# Altium PCB MasterBoard.PcbDoc (part 3 of 4)
Units mil, origin at the board's own origin, x right, y up, seen from the top; angles counter-clockwise.
Board outline 11195 x 7075 mil, 2 copper layers (Top Layer, Bottom Layer); 563 components, 331 nets, 1395 pads, 369 vias.
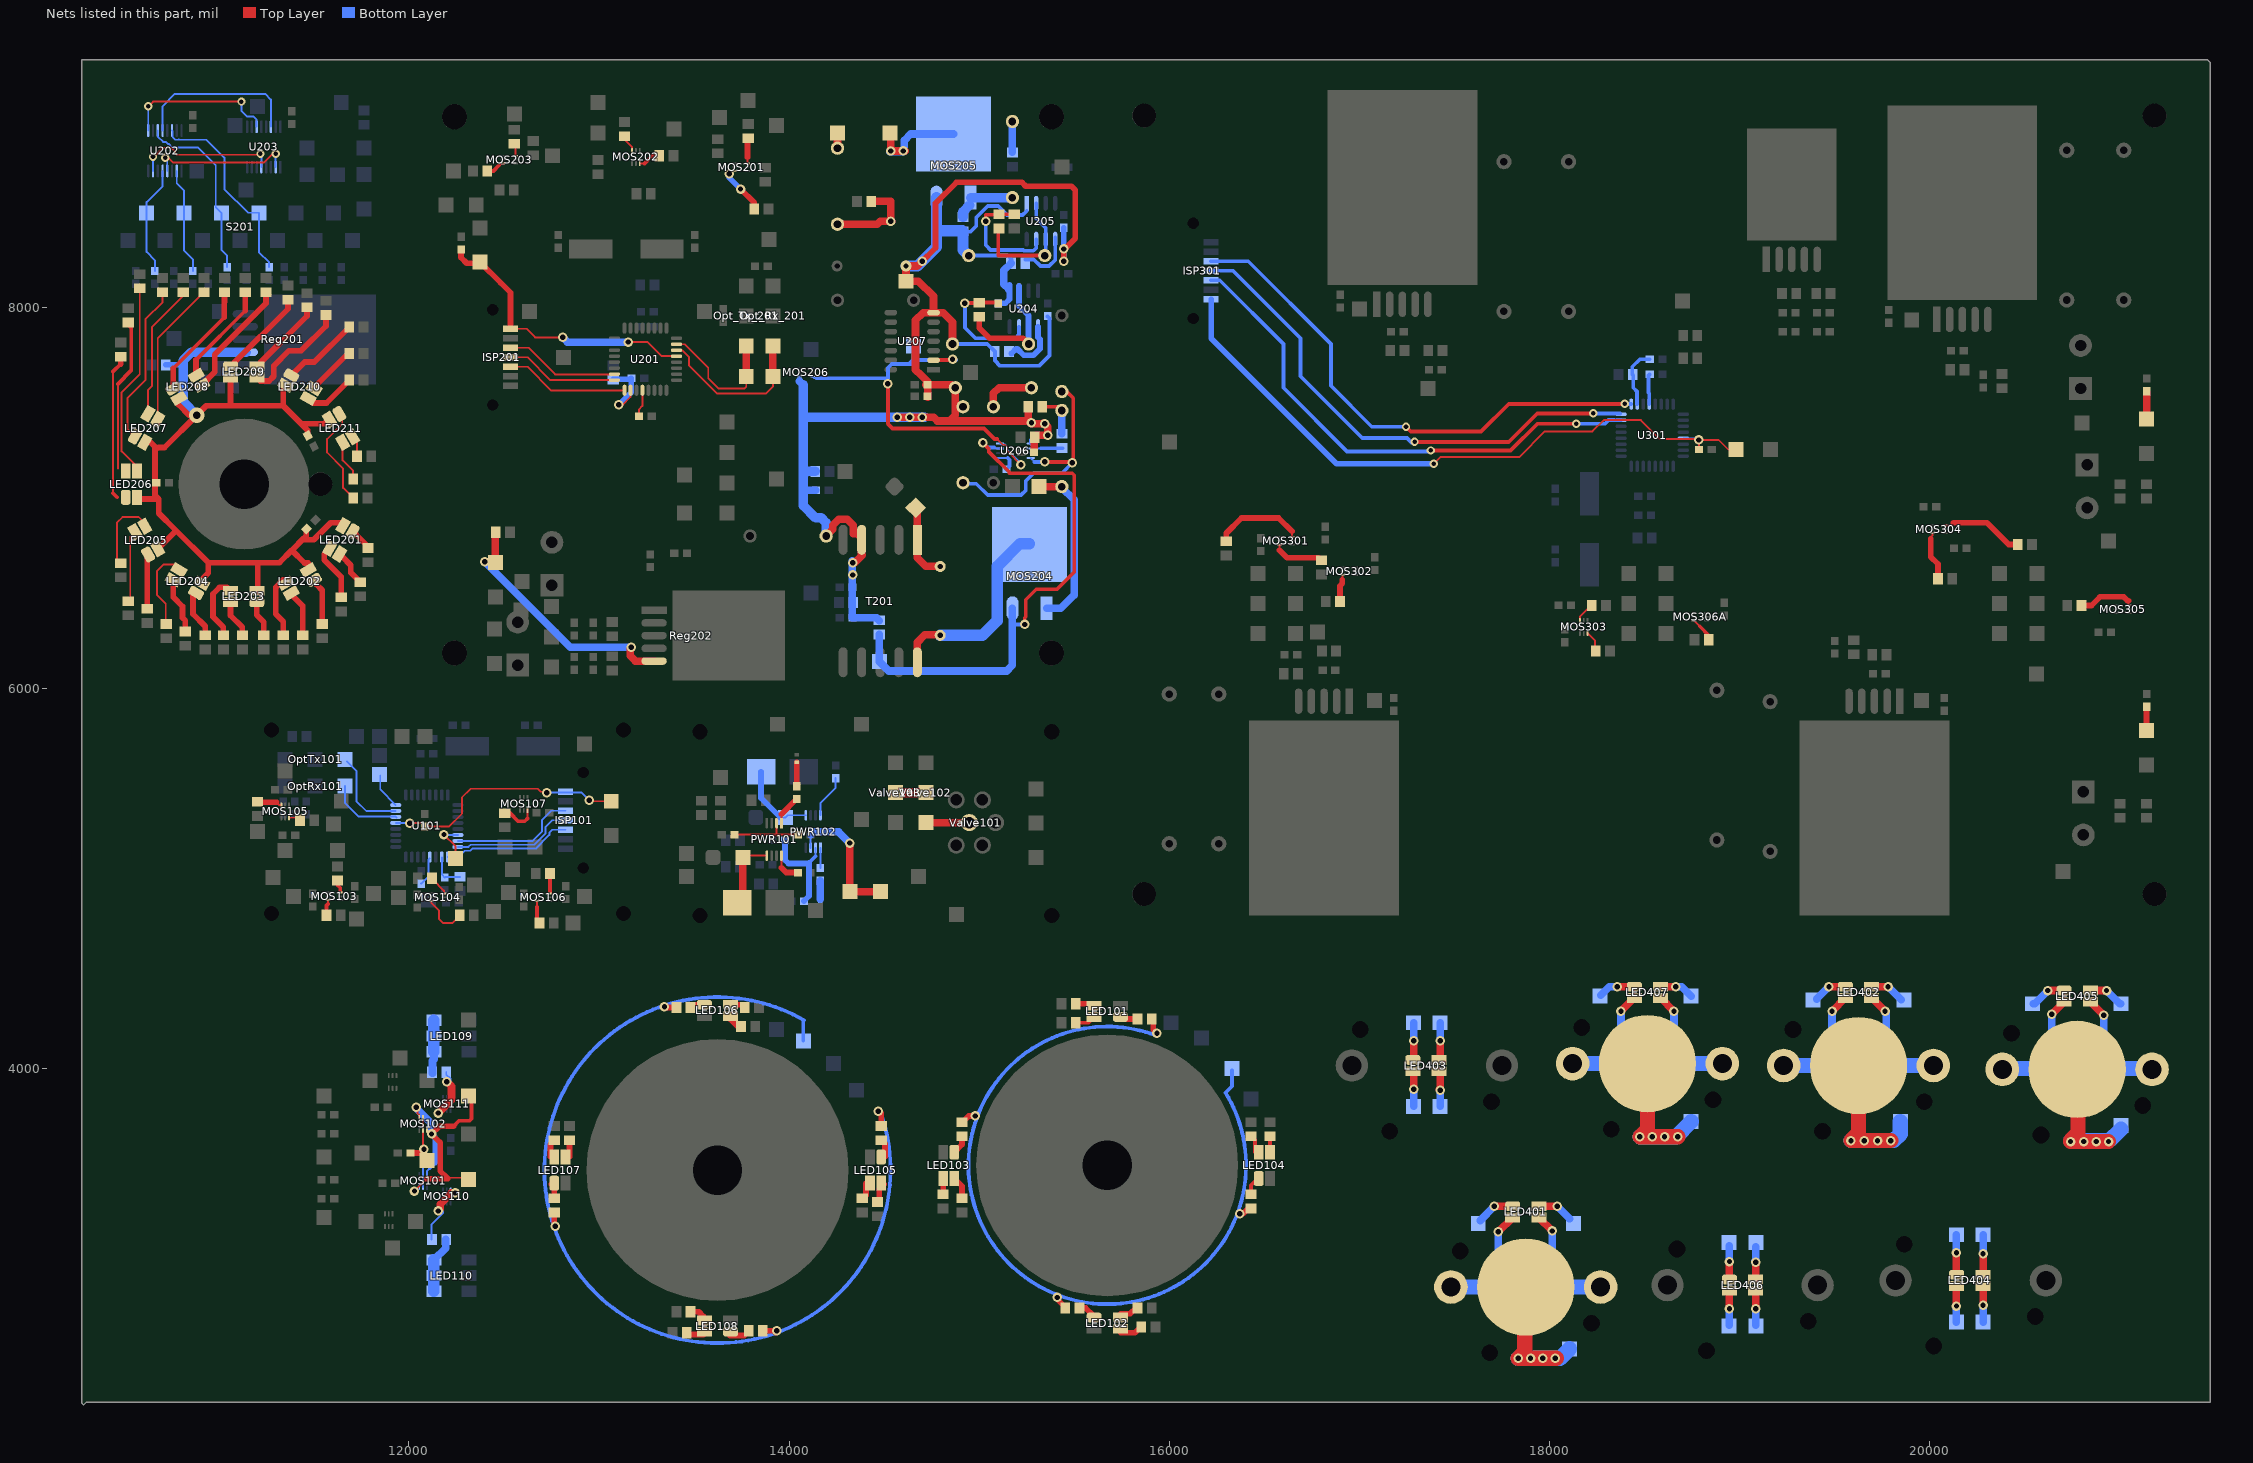
[diagram p3: the nets of this part, all layers, seen from the top]

## Via types
v1: diameter 50, hole 28, Top Layer to Bottom Layer, 263 vias
v2: diameter 80, hole 60, Top Layer to Bottom Layer, 55 vias
v3: diameter 44, hole 24, Top Layer to Bottom Layer, 25 vias
v4: diameter 72, hole 52, Top Layer to Bottom Layer, 11 vias
v5: diameter 145, hole 125, Top Layer to Bottom Layer, 8 vias
v6: diameter 60, hole 40, Top Layer to Bottom Layer, 2 vias
v7: diameter 80, hole 40, Top Layer to Bottom Layer, 2 vias
v8: diameter 100, hole 60, Top Layer to Bottom Layer, 1 vias
v9: diameter 100, hole 80, Top Layer to Bottom Layer, 1 vias
v10: diameter 50, hole 28, Top Layer to Bottom Layer, tented top, 1 vias

## Nets (pads, with @x,y where several pads share a name; then routed paths per layer and width w, separated by ;. In a path a pad name is that pad's centre, name@x,y a point inside that pad or via, vN(x,y) a via of type N, cw(c..) or ccw(c..) an arc to the next point about the centre after c; other vN are vias at no path point) (continued)
HVGND201: C213.1 C218.2 C219.2 C220.2 C221.2 C222.2 C230.1 C231.1 C232.1 C233.1 C234.2 C235.2 C236.2 C237.2 C238.2 C242.2 C243.2 C299.2 L205.1 MOS205.3 MOS206.1 R261.2 R263a.2 R265.2 R275.2 R276.1 T201.4 TP226.1 U204.1 U205.1 U206.5 U207.7 | length 9933.3
  Top Layer w20: TP226.1@14615,8140 C213.1@14615,8220
  Top Layer w30: v1@14695,8240 14770,8315 14770,8550 14880,8660 15225,8660 15245,8640 15485,8640 15505,8620 15505,8365 15445,8305 v1(15445,8245)
  Top Layer w40: L205.1@14195,6800 14230.83,6835.83 14230.83,6857.33 14262.24,6888.74 14306.66,6888.74 14338.07,6857.33 14338.07,6811.93 14358.07,6811.93 14380,6790 14380,6700 ; v1(14335,6660) 14345,6660 14385,6700 ; v1@14575,7425 14760,7425 14780,7405 15260,7405 15275,7390 v1(15345,7390) ; C213.1@14615,8220 14675,8220 v1(14700,8245) ; C213.1@14615,8230 TP226.1@14615,8140 14680,8140 14760,8060 U207.7@14760,7975 14810,7975 14860,7925 C232.1@14860,7810 ; C242.2@14728.46,7595 14728.46,7611.84 14695.62,7644.69 14695.31,7644.69 14665,7675 14665,7935 14705,7975 U207.7@14780,7975 ; C243.2@14730,7530 14730,7585 14720,7595 14773.46,7595 14855,7595 R263a.2@14875,7575 ; 14845,7405 14875,7435 14875,7485 ; R263a.2@14875,7580 14875,7485 ; R265.2@14920,7485 14875,7485 ; R275.2@15257.6,7480 15257.6,7412.4 v1@15280,7390 ; C237.2@15290,7240 15290,7317.6 C234.2@15292.4,7320 ; C234.2@15300,7330 v1(15360,7330) 15360,7375 v1@15340,7395
  Bottom Layer w10: 14055,7615 MOS206.1@14055,7640
  Bottom Layer w20: C232.1@14860,7810 15042.6,7810 C230.1@15082.6,7770 15082.6,7722.4 15110,7695 15315,7695 15370,7750 15370,7945 C220.2@15360,7955 ; R276.1@14920,8400 14955,8400 14985,8430 14985,8475 15045,8535 15100,8535 15146.54,8488.46 C238.2@15185,8488.46 15228.46,8488.46 15250,8510 ; C233.1@14945,8275 15150,8275 C231.1@15170,8255 ; v1@15260,7395 15340,7395 15360,7375 v1(15360,7330) ; U206.5@15271.42,7286.77 15271.42,7306.42 15295,7330 v1@15370,7330
  Bottom Layer w30: C235.2@15100,8023.46 15138.46,8023.46 15160,8045 U204.1@15160,8120 ; 15445,8270 C299.2@15445,8421.54
  Bottom Layer w40: 14055,7615 14075,7595 ; 14085,7040 C236.2@14141.54,7040 ; v1@14333.46,6668.46 C222.2@14333.46,6530 C221.2@14333.46,6370 14460,6370 R261.2@14475,6355 ; U204.1@15155,8095 15155,8100 15130,8125 15130,8197.4 C231.1@15167.6,8235
  Bottom Layer w50: 14075,7595 14075,7425 ; 14080,7140 C218.2@14137.6,7140 ; 14090,7135 14075,7150 ; L205.1@14195,6800 14195,6870 14170,6895 14140,6895 14075,6960 14075,7150 ; v1@14715,7425 14580,7425 14550,7425 14075,7425 ; 14075,7150 14075,7390 14075,7425
  Bottom Layer w60: C213.1@14615,8220 14675,8220 14775.47,8320.47 14775.47,8404.53 R276.1@14910.47,8404.53 ; 14775.47,8400.47 MOS205.3@14775.47,8580 ; R276.1@14915,8402.6 14915,8305 C233.1@14945,8275
  other v1: 14335,6595 15275,7395 14570,7425 14635,7425 14700,7425 15445,8310
ISENSE_201: MOS204.3 R261.1 TP220.1 U206.3 | length 2874.5
  Top Layer w20: v1@15015,7295 15050,7260 15050,7245 15160,7135 ; 15160,7130 15490,7130 15500,7120 15500,6610 15410,6520 15300,6520 15245,6465 15245,6375 15240,6370 v1@15240,6330
  Bottom Layer w10: 15079.55,7265 15084.55,7260 U206.3@15125,7260
  Bottom Layer w20: v1(15020,7290) 15045,7265 15079.55,7265 ; 15185,6335 v1(15240,6335)
  Bottom Layer w40: R261.1@14475,6282.6 TP220.1@14475,6140 14525,6090 15145,6090 15175,6120 MOS204.3@15175,6420
MISO101: ISP101.4 U101.16 | length 624.2
  Bottom Layer w10: U101.16@12258.39,5164.76 12313.5,5164.76 12325,5176.26 12659.54,5176.26 12720,5236.72 12720,5270 12755,5305 ISP101.4@12805,5305
MISO201: ISP201.4 U201.16 | length 594.7
  Top Layer w10: ISP201.4@12535,7740 12625,7740 12745,7620 U201.16@13080,7620
MISO301: ISP301.4 U301.16 | length 2705
  Top Layer w20: v3(17290,7295) 17785,7295 17935,7445 v3(18230,7445)
  Bottom Layer w20: ISP301.4@16220,8195 16335,8195 16690,7840 16690,7640 17015,7315 17250,7315 17275,7290 v3(17290,7295) ; v3(18230,7445) U301.16@18370,7445
MOSI101: ISP101.3 U101.15 | length 667.5
  Bottom Layer w10: U101.15@12258.39,5196.26 12651.26,5196.26 12700,5245 12700,5305 12750,5355 ISP101.3@12825,5355
MOSI201: ISP201.3 U201.15 | length 603
  Top Layer w10: ISP201.3@12535,7790 12630,7790 12770,7650 U201.15@13080,7650
MOSI301: ISP301.3 U301.15 | length 2730.9
  Top Layer w20: v3(17375,7250) 17795,7250 17935,7390 v3(18140,7390)
  Bottom Layer w20: ISP301.3@16220,8145 16265,8145 16600,7810 16600,7580 16935,7245 v3@17375,7245 ; v3(18140,7390) 18290,7390 18310,7410 18339.05,7410 18340.31,7408.74 U301.15@18376.61,7408.74
NetC107_2: C107.2 U101.20 | length 152.1
  Bottom Layer w10: C107.2@12065,4971.54 12104.09,5010.63 12104.09,5099.09 U101.20@12110,5105
NetC108_2: C108.2 L101.1 U101.18 | length 190.3
  Bottom Layer w10: U101.18@12175,5110 12175,5018.46 C108.2@12190,5003.46 ; C108.2@12192.4,5007.4 L101.1@12270,5007.4
NetC118_2: C118.2 PWR101.8 | length 160.6
  Top Layer w10: 13960,5055 PWR101.8@13960,5118.74
  Top Layer w30: 13960,5055 13985,5030 C118.2@14046.54,5030
NetC119_2: C119.2 R131.1 | length 126.5
  Top Layer w30: R131.1@14040,5483.46 C119.2@14040,5610
NetC120_2: C120.2 PWR102.8 | length 228.4
  Bottom Layer w10: PWR102.8@14165,5331.26 14165,5395 14245,5475 C120.2@14245,5526.54
NetC121_2: C121.2 R133.1 | length 96.5
  Bottom Layer w40: 14165,4890 R133.1@14165,4986.54
NetC201_2: C201.2 C202.2 C240.2 C241.2 LED201.2 LED202.2 LED203.2 LED204.2 LED205.2 LED206.2 LED207.2 LED208.2 LED209.2 LED210.2 LED211.2 Reg201.2 | length 4335
  Top Layer w30: LED206.2@10579.45,6995 10685,6995 ; 10641.56,7293.44 10675,7260 10665,7260 10665,7015 10685,6995 ; 10685,7265 10715,7265 v7(10885,7435) ; LED205.2@10691.28,6743.72 10770,6822.44 10770,6835 ; 10791.59,7488.41 10845,7435 v7(10885,7435) ; LED204.2@10910.93,6570.93 10945,6605 10945,6660 ; 11062.87,7487.87 LED209.2@11062.87,7615 ; LED203.2@11205,6535 11205,6660 ; 11340,7570 11340,7485 ; 11395,6735 11440,6780 ; C240.2@11461.34,6836.34 11461.34,6801.34 11440,6780 ; C202.2@11468.27,7328.98 11468.27,7356.73 11435,7390 ; 11471.95,6658.05 11451.95,6658.05 11385,6725 11320,6660 11205,6660 ; LED211.2@11570,7405 11555,7390 11435,7390 ; LED201.2@11638.31,6870 11590,6870 11500,6780 11440,6780 ; 10685,6995 10685,6920 10770,6835 ; 10770,6835 10945,6660 ; v7(10885,7435) 10935,7485 11340,7485 ; 10945,6660 11205,6660 ; 11340,7485 11435,7390
  Bottom Layer w30: C201.2@10722.4,7700 10790,7700
  Bottom Layer w50: v7(10885,7435) 10815,7505 10815,7725 10856.93,7766.93 Reg201.2@11145,7766.93
NetC208_2: C208.2 U201.20 | length 144.6
  Top Layer w10: C208.2@13210,7430 13210,7465 13229.25,7484.25 U201.20@13229.25,7566.61
NetC209_2: C209.2 L201.1 U201.18 | length 377.7
  Top Layer w10: v1(13105,7490) 13125,7490 13166.26,7531.26 U201.18@13166.26,7566.61
  Bottom Layer w30: L201.1@13075,7625 13165,7625 13170,7630 13170,7555 v1(13105,7490)
NetC211_1: C211.1 D201.3 T201.1 | length 403.6
  Top Layer w40: D201.3@14675,6950 T201.1@14675,6780 14675,6685 14720,6640 C211.1@14795,6640
NetC211_2: C211.2 MOS204.1 T201.10 | length 1077.3
  Top Layer w40: T201.10@14675,6135.91 14675,6240 14715,6280 C211.2@14795,6280
  Bottom Layer w60: C211.2@14795,6277.8 15017.8,6277.8 15095,6355 15095,6640 15215,6760 MOS204.1@15265,6760
NetC217_1: C217.1 EL201.2 MOS205.1 | length 566.6
  Top Layer w40: EL201.2@14535,8910 C217.1@14535,8825.04 v1@14610,8825.04
  Bottom Layer w40: C217.1@14530,8820 14600,8820 14605,8825 14605,8880 14639.65,8914.65 MOS205.1@14865.24,8914.65
  other v1: 14600,8825
NetC217_2: C217.2 L203.1 R273.2 | length 491.3
  Top Layer w40: L203.1@14255,8440 14465,8440 14480,8455 C217.2@14540,8455 ; R273.2@14440,8560 14535,8560 C217.2@14535,8454.96
NetC229_1: C229.1 U206.1 | length 121
  Bottom Layer w10: U206.1@15100,7210 15150,7210
  Bottom Layer w20: C229.1@15143.46,7150 15160,7166.54 15160,7200 15150,7210
NetC230_2: C230.2 U204.5 | length 309.6
  Bottom Layer w30: C230.2@15170,7760 15195.15,7785.15 15200,7785.15 15235.15,7750 15284.85,7750 15320,7785.15 15320,7834.85 15310,7844.85 U204.5@15310,7901.02
NetC231_2: C231.2 U205.5 | length 303.2
  Bottom Layer w20: C231.2@15242.4,8255 15287.22,8255 15322.22,8220 15367.78,8220 15400,8252.22 U205.5@15400,8370
NetC232_2: C232.2 R271.2 U204.2 U204.6 | length 685.9
  Top Layer w30: R271.2@15000,7955 15000,7895 15055,7840 15230,7840 C232.2@15260,7810
  Bottom Layer w30: U204.2@15210,8115 15210,8010 15260,7960 U204.6@15260,7901.02 C232.2@15260,7805
NetC233_2: C233.2 R272.2 U205.2 U205.6 | length 682.8
  Top Layer w20: R272.2@15100,8415 15100,8275 C233.2@15345,8275
  Bottom Layer w20: U205.2@15300,8550 15300,8470 15350,8420 U205.6@15350,8361.02 15350,8280 C233.2@15345,8275
NetC322_2: C322.2 U301.20 | length 160.4
  Bottom Layer w20: U301.20@18524.25,7493.39 18524.25,7549.32 18520,7553.57 18520,7645 C322.2@18525,7650
NetC323_2: C323.2 L301.1 U301.18 | length 313.5
  Bottom Layer w20: U301.18@18460,7495 18460,7560 18440,7580 18440,7645 18436.2,7648.8 18435,7650 18435,7690 18475,7730 C323.2@18526.54,7730
NetD101_3: D101.3 L102.2 PWR101.5 | length 369.3
  Top Layer w10: D101.3@13766.22,5118.74 PWR101.5@13883.23,5118.74
  Top Layer w30: L102.2@13727.8,4870 L102.2@13757.48,4899.69
  Top Layer w40: L102.2@13757.48,4899.69 D101.3@13757.48,5110
NetD102_3: D102.3 L103.2 PWR102.5 | length 420.2
  Bottom Layer w10: D102.3@13955,5320 D102.3@13982.48,5320 13993.74,5331.26 PWR102.5@14088.23,5331.26
  Bottom Layer w30: L103.2@13852.8,5560 13852.8,5422.2 D102.3@13955,5320
NetEL201_1: EL201.1 L203.2 | length 75
  Top Layer w40: L203.2@14255,8845 EL201.1@14255,8920
NetI401_1: I401.1 I403.1 | length 810
  Bottom Layer w80: I401.1@20370,4000 I403.1@20785,4000 I401.1@21180,4000
NetI402_1: I402.1 I404.1 | length 803.7
  Bottom Layer w80: I402.1@17481.3,2850 I402.1@18285,2850
NetI405_1: I405.1 I407.1 | length 956.1
  Top Layer w80: I407.1@19625,4010 19625,3660 v1(19585,3620) v1(19795,3620)
  Bottom Layer w80: v1(19585,3620) 19810,3620 19845,3655 I405.1@19845,3720
  other v1: 19655,3620 19725,3620
NetI406_1: I406.1 I408.1 | length 899.7
  Top Layer w80: I408.1@18515,4020 18515,3680 v1(18475,3640) v1(18675,3640)
  Bottom Layer w80: v1(18475,3640) 18665,3640 I406.1@18745,3720
  other v1: 18540,3640 18605,3640
NetI409_1: I409.1 LED401.1 | length 202
  Top Layer w40: v1(17709.53,3274.53) LED401.1@17806.1,3274.53
  Bottom Layer w40: I409.1@17635,3200 v1(17709.53,3274.53)
NetI410_1: I410.1 LED402.1 | length 177.8
  Top Layer w40: v1(19469.53,4429.53) LED402.1@19556.1,4429.53
  Bottom Layer w40: I410.1@19405,4365 v1(19469.53,4429.53)
NetI411_1: I411.1 LED403.1 | length 175
  Top Layer w40: LED403.1@17285,4065 v1(17285,4145)
  Bottom Layer w40: v1(17285,4145) I411.1@17285,4240
NetI412_1: I412.1 LED404.1 | length 185
  Top Layer w40: LED404.1@20140,2940 v1(20140,3030)
  Bottom Layer w40: v1(20140,3030) I412.1@20140,3125
NetI413_1: I413.1 LED401.4 | length 187.8
  Top Layer w40: LED401.4@17943.9,3274.53 v1(18040.47,3274.53)
  Bottom Layer w40: v1(18040.47,3274.53) I413.1@18105,3210
NetI414_1: I414.1 LED402.4 | length 184.9
  Top Layer w40: LED402.4@19693.9,4429.53 v1(19780.47,4429.53)
  Bottom Layer w40: v1(19780.47,4429.53) I414.1@19850,4360
NetI415_1: I415.1 LED403.4 | length 165
  Top Layer w40: 17425,4075 v1(17425,4145)
  Bottom Layer w40: v1(17425,4145) I415.1@17425,4240
NetI416_1: I416.1 LED404.4 | length 180
  Top Layer w40: 20280,2945 v1(20280,3025)
  Bottom Layer w40: v1(20280,3025) I416.1@20280,3125
NetI417_1: I417.1 LED401.3 | length 302.7
  Top Layer w40: LED401.3@17943.9,3215.47 v1(18014.37,3145)
  Bottom Layer w40: I417.1@17945,3000 17995,3000 18014.37,3019.37 v1(18014.37,3145)
NetI418_1: I418.1 LED402.3 | length 283.2
  Top Layer w40: LED402.3@19693.9,4370.47 v1(19764.37,4300)
  Bottom Layer w40: I418.1@19705,4175 19755,4175 19770,4190 19770,4294.37 v1(19764.37,4300)
NetI419_1: I419.1 LED403.3 | length 167.1
  Top Layer w40: v1@17420,3890 v1(17425,3885) LED403.3@17425,3960
  Bottom Layer w40: I419.1@17425,3800 v1(17425,3885)
NetI420_1: I420.1 LED404.3 | length 170
  Top Layer w40: v1(20280,2755) LED404.3@20280,2835
  Bottom Layer w40: I420.1@20280,2665 v1(20280,2755)
NetI421_1: I421.1 LED401.2 | length 302.7
  Top Layer w40: v1(17730.63,3140) LED401.2@17806.1,3215.47
  Bottom Layer w40: v1(17730.63,3140) 17730.63,3019.37 17745,3005 I421.1@17800,3005
NetI422_1: I422.1 LED402.2 | length 267.7
  Top Layer w40: v1(19485.63,4300) LED402.2@19556.1,4370.47
  Bottom Layer w40: v1(19485.63,4300) 19485.63,4199.37 19505,4180 I422.1@19545,4180
NetI423_1: I423.1 LED403.2 | length 165
  Top Layer w40: v1(17285,3890) LED403.2@17285,3965
  Bottom Layer w40: I423.1@17285,3800 v1(17285,3890)
NetI424_1: I424.1 LED404.2 | length 160
  Top Layer w40: v1(20140,2750) 20140,2825
  Bottom Layer w40: I424.1@20140,2665 v1(20140,2750)
NetI425_1: I425.1 I427.1 | length 788.7
  Bottom Layer w80: I425.1@19231.3,4015 I425.1@20020,4015
NetI426_1: I426.1 I428.1 | length 788.7
  Bottom Layer w80: I426.1@18121.3,4025 I426.1@18910,4025
NetI429_1: I429.1 I431.1 | length 880.2
  Top Layer w80: I431.1@17870,2850 17870,2510 v1(17835,2475) v1@18035,2475
  Bottom Layer w80: v1(17835,2475) 18055,2475 I429.1@18105,2525
  other v1: 17900,2475 17965,2475 18030,2475
NetI430_1: I430.1 I432.1 | length 871.4
  Top Layer w80: v1(20740,3615) v1(20940,3615) ; v1@20740,3620 20780,3660 I432.1@20780,3985
  Bottom Layer w80: v1@20740,3620 20945,3620 I430.1@21005,3680
  other v1: 20810,3615 20875,3615
NetI433_1: I433.1 LED405.1 | length 189.9
  Top Layer w40: v1(20620.47,4409.53) LED405.1@20706.1,4409.53
  Bottom Layer w40: I433.1@20545,4340 20550.94,4340 v1(20620.47,4409.53)
NetI434_1: I434.1 LED406.1 | length 176.6
  Top Layer w40: LED406.1@18946.1,2889.53 v1(18946.1,2983.9)
  Bottom Layer w40: v1(18946.1,2983.9) I434.1@18946.1,3066.1
NetI435_1: I435.1 LED407.1 | length 194.5
  Top Layer w40: v1(18355.47,4429.53) LED407.1@18446.1,4429.53
  Bottom Layer w40: I435.1@18270,4385 18314.53,4429.53 v1(18355.47,4429.53)
NetI436_1: I436.1 LED405.4 | length 189.9
  Top Layer w40: LED405.4@20843.9,4409.53 v1(20929.53,4409.53)
  Bottom Layer w40: v1(20929.53,4409.53) 20999.06,4340 I436.1@21005,4340
NetI437_1: I437.1 LED406.4 | length 177.1
  Top Layer w40: LED406.4@19083.9,2889.53 v1(19083.9,2981.1)
  Bottom Layer w40: v1@19080,2985 v1(19083.9,2981.1) I437.1@19083.9,3061.1
NetI438_1: I438.1 LED407.4 | length 181.6
  Top Layer w40: LED407.4@18583.9,4429.53 v1(18664.53,4429.53)
  Bottom Layer w40: v1(18664.53,4429.53) 18695.47,4429.53 I438.1@18745,4380
NetI439_1: I439.1 LED405.3 | length 252.7
  Top Layer w40: LED405.3@20843.9,4350.47 v1(20914.37,4280)
  Bottom Layer w40: I439.1@20850,4180 20895,4180 20914.37,4199.37 v1(20914.37,4280)
NetI440_1: I440.1 LED406.3 | length 180.9
  Top Layer w40: v1(19083.9,2736.1) LED406.3@19083.9,2830.47
  Bottom Layer w40: v1(19083.9,2736.1) 19085,2735 I440.1@19085,2650
NetI441_1: I441.1 LED407.3 | length 262.7
  Top Layer w40: LED407.3@18583.9,4370.47 v1(18654.37,4300)
  Bottom Layer w40: I441.1@18585,4195 18635,4195 18654.37,4214.37 v1(18654.37,4300)
NetI442_1: I442.1 LED405.2 | length 253.5
  Top Layer w40: v1(20640.63,4285) LED405.2@20706.1,4350.47
  Bottom Layer w40: v1(20640.63,4285) 20640.63,4194.37 20655,4180 I442.1@20705,4180
NetI443_1: I443.1 LED406.2 | length 180.9
  Top Layer w40: v1(18946.1,2736.1) LED406.2@18946.1,2830.47
  Bottom Layer w40: I443.1@18945,2650 18945,2735 v1(18946.1,2736.1)
NetI444_1: I444.1 LED407.2 | length 257.7
  Top Layer w40: v1(18375.63,4300) LED407.2@18446.1,4370.47
  Bottom Layer w40: v1(18375.63,4300) 18375.63,4214.37 18395,4195 I444.1@18440,4195
NetL202_1: L202.1 R260.1 R275.1 | length 240.6
  Top Layer w20: R275.1@15332.4,7480 15410,7480 L202.1@15435,7455
  Bottom Layer w40: R260.1@15435,7337.4 L202.1@15435,7465
NetL202_2: L202.2 MOS204.2 TP216.1 | length 895.9
  Top Layer w40: TP216.1@15315,7060 L202.2@15445,7060
  Bottom Layer w40: MOS204.2@15355,6420 15430,6420 15500,6490 15500,6990 L202.2@15435,7055
NetL204_1: L204.1 R262.1 | length 162.6
  Bottom Layer w40: R262.1@15175,8817.4 L204.1@15175,8980
NetL204_2: L204.2 MOS205.2 R276.2 | length 302.1
  Bottom Layer w50: R276.2@14915,8477.4 14915,8505 MOS205.2@14950,8540 ; MOS205.2@14955,8580 L204.2@15180,8580
NetLED101_1: LED101.1 R102.2 | length 96.5
  Top Layer w30: LED101.1@15740,4260 15742.56,4260 R102.2@15836.54,4260
NetLED101_3: LED101.3 R101.2 | length 113.4
  Top Layer w20: LED101.3@15589.29,4345 15594.29,4340 LED101.3@15604.76,4329.53
  Top Layer w30: R101.2@15503.46,4340 15594.29,4340 LED101.3@15595,4340
NetLED101_4: LED101.4 R139.2 | length 112.4
  Top Layer w20: R139.2@15505,4240 15574.29,4240 LED101.4@15604.76,4270.47
NetLED102_1: LED102.1 R103.2 | length 88
  Top Layer w30: R103.2@15525,2740 15560,2740 LED102.1@15597.5,2702.5
NetLED102_3: LED102.3 R140.2 | length 124
  Top Layer w30: LED102.3@15745,2610 15820,2610 15850,2640 R140.2@15856.54,2640
NetLED102_4: LED102.4 R141.2 | length 104
  Top Layer w30: LED102.4@15745,2710 15795,2710 15825,2740 R141.2@15836.54,2740
NetLED103_1: LED103.1 R104.2 | length 102.9
  Top Layer w30: LED103.1@14869.53,3558.9 14910,3599.37 R104.2@14910,3645
NetLED103_3: LED103.3 R142.2 | length 86.3
  Top Layer w30: R142.2@14810,3335 14810.47,3335.47 LED103.3@14810.47,3421.1
NetLED103_4: LED103.4 R143.2 | length 98.5
  Top Layer w30: LED103.4@14890.32,3400.32 14910,3380.63 14910,3313.46 R143.2@14910,3310
NetLED104_1: LED104.1 R117.2 | length 75.9
  Top Layer w20: R117.2@16430,3337.4 16430,3385 LED104.1@16450,3405
NetLED104_3: LED104.3 R144.2 | length 81.3
  Top Layer w20: LED104.3@16529.53,3558.9 16530,3559.37 R144.2@16530,3640
NetLED104_4: LED104.4 R145.2 | length 90.9
  Top Layer w20: R145.2@16430,3642.6 16450,3622.6 LED104.4@16450,3560
NetLED105_1: LED105.1 R135.2 | length 99.8
  Top Layer w30: R135.2@14485,3626.54 14485,3625 14505,3605 LED105.1@14505,3535
NetLED105_3: LED105.3 R146.2 | length 89.8
  Top Layer w30: R146.2@14385,3313.46 14405,3333.46 LED105.3@14405,3395
NetLED105_4: LED105.4 R147.2 | length 96.9
  Top Layer w30: R147.2@14475,3303.46 14475,3365 LED105.4@14500,3390
NetLED106_1: LED106.1 R136.2 | length 80.8
  Top Layer w30: R136.2@13480,4320 13494.53,4334.53 LED106.1@13554.76,4334.53
NetLED106_3: LED106.3 R148.2 | length 71.6
  Top Layer w30: LED106.3@13690,4260 13730,4220 R148.2@13745,4220
NetLED106_4: LED106.4 R149.2 | length 67.9
  Top Layer w30: LED106.4@13692.56,4334.53 R149.2@13760.47,4334.53
NetLED107_1: LED107.1 R137.2 | length 82.7
  Top Layer w30: LED107.1@12750,3390 12754.68,3385.32 12765,3375 R137.2@12765,3313.46
NetLED107_3: LED107.3 R150.2 | length 91.5
  Top Layer w30: LED107.3@12845,3535 R150.2@12845,3626.54
NetLED107_4: LED107.4 R151.2 | length 99.8
  Top Layer w30: LED107.4@12745,3535 12745,3600 12765,3620 R151.2@12765,3626.54
NetLED108_1: LED108.1 R138.2 | length 111.9
  Top Layer w30: LED108.1@13690,2595 13692.56,2595 13765,2595 13790,2620 R138.2@13791.54,2620
NetLED108_3: LED108.3 R152.2 | length 81.9
  Top Layer w30: R152.2@13478.46,2720 13525,2720 LED108.3@13550,2695
NetLED108_4: LED108.4 R153.2 | length 91.5
  Top Layer w30: R153.2@13458.46,2600 LED108.4@13550,2600
NetLED109_2: LED109.2 R102B.2 | length 280.8
  Bottom Layer w40: R102B.2@12125,3975 12125,3980 12125,4040 12132.48,4047.48 LED109.2@12132.48,4087.32 LED109.2@12132.48,4087.48
  Bottom Layer w60: LED109.2@12132.48,4087.48 LED109.2@12132.48,4170 LED109.2@12132.48,4252.68
NetLED110_2: LED110.2 R102A.2 | length 298.6
  Bottom Layer w40: LED110.2@12132.48,2992.48 12132.58,2992.58 12195,3055 R102A.2@12195,3100
  Bottom Layer w60: LED110.2@12132.48,2827.32 LED110.2@12132.48,2910 LED110.2@12132.48,2992.48
NetLED201_1: LED201.1 R213.2 | length 96
  Top Layer w30: LED201.1@11722.46,6807.46 11785,6744.92 R213.2@11785,6737.4
NetLED201_3: LED201.3 R211.2 | length 265
  Top Layer w30: 11555,6705.12 11555,6675 11645,6585 R211.2@11645,6477.4
NetLED201_4: LED201.4 R212.2 | length 176
  Top Layer w30: LED201.4@11648.35,6693.35 11695,6646.69 11695,6607.4 R212.2@11745,6557.4
NetLED202_1: LED202.1 R216.2 | length 220
  Top Layer w30: 11515,6545 11545,6515 R216.2@11545,6337.4
NetLED202_3: LED202.3 R214.2 | length 325.7
  Top Layer w30: R214.2@11340,6277.4 11340,6350 11300,6390 11300,6530 11337.26,6567.26 LED202.3@11340,6570
NetLED202_4: LED202.4 R215.2 | length 222.3
  Top Layer w30: LED202.4@11395,6480 11442.5,6432.5 R215.2@11442.5,6277.4
NetLED203_1: LED203.1 R219.2 | length 172.9
  Top Layer w30: LED203.1@11200.67,6435 11200.67,6384.33 11237.5,6347.5 R219.2@11237.5,6277.4
NetLED203_3: LED203.3 R217.2 | length 329.3
  Top Layer w30: R217.2@11025,6277.4 11025,6320 10970,6375 10970,6495 11005,6530 LED203.3@11044.45,6530
NetLED203_4: LED203.4 R218.2 | length 183.3
  Top Layer w30: LED203.4@11062.87,6435 11062.87,6382.13 11125,6320 R218.2@11125,6277.4
NetLED204_1: LED204.1 R222.2 | length 233.9
  Top Layer w30: LED204.1@10865,6484.37 10865,6390 10930,6325 R222.2@10930,6277.4
NetLED204_3: LED204.3 R220.2 | length 400.2
  Top Layer w10: R220.2@10722.07,6340.34 10722.07,6442.93 10675,6490 10675,6615 10710,6650 10762.4,6650
  Top Layer w30: R220.2@10722.07,6340.34 R220.2@10725,6337.4
NetLED204_4: LED204.4 R221.2 | length 278.7
  Top Layer w30: LED204.4@10762.07,6550 10762.07,6477.93 10810,6430 10810,6370 10825,6355 R221.2@10825,6297.4
NetLED205_1: LED205.1 R225.2 | length 281.7
  Top Layer w30: R225.2@10625,6417.4 LED205.1@10625,6699.05
NetLED205_3: LED205.3 R223.2 | length 401.1
  Top Layer w10: R223.2@10465,6657.4 10465,6870 10495,6900 10580,6900 10611.08,6868.92 LED205.3@10611.08,6851.75
NetLED205_4: LED205.4 R224.2 | length 379.3
  Top Layer w10: R224.2@10525,6457.4 10535,6467.4 10535,6797.29 LED205.4@10559.94,6822.23
NetLED206_1: LED206.1 R228.2 | length 764.3
  Top Layer w10: 10445,7025 10445,7665
  Top Layer w20: 10445,7025 10466.3,7003.7 ; 10445,7665 10485,7705
  Top Layer w30: 10485,7705 R228.2@10485,7742.6
NetLED206_3: LED206.3 R226.2 | length 1038.2
  Top Layer w10: R226.2@10585,8102.6 10585,7650 10490.15,7555.15 10490.15,7244.85 10582.13,7152.87 LED206.3@10590,7145
NetLED206_4: LED206.4 R227.2 | length 802.8
  Top Layer w10: 10470,7155 10470,7600
  Top Layer w20: 10470,7600 10540,7670 10540,7895 10525,7910 R227.2@10525,7922.6
NetLED207_1: LED207.1 R231.2 | length 852.8
  Top Layer w10: LED207.1@10559.94,7322.97 10520,7362.91 10520,7525 10615,7620 10615,7940 10705,8030 R231.2@10705,8082.6
NetLED207_3: LED207.3 R229.2 | length 770.3
  Top Layer w10: LED207.3@10679.98,7412.78 10679.98,7840.08 R229.2@10922.5,8082.6
NetLED207_4: LED207.4 R230.2 | length 698
  Top Layer w10: LED207.4@10628.84,7442.3 10628.84,7568.84 10650,7590 10650,7900 R230.2@10813.75,8063.75
NetLED208_1: LED208.1 R234.2 | length 594.1
  Top Layer w20: 10762.07,7682.07 11030,7950
  Top Layer w30: LED208.1@10762.07,7600 10762.07,7682.07 ; 11030,7950 11030,8030 11031.25,8031.25 R234.2@11031.25,8082.6
NetLED208_3: LED208.3 R232.2 | length 629.2
  Top Layer w30: LED208.3@10910.93,7593.29 10980,7662.36 10980,7755 11248.75,8023.75 R232.2@11248.75,8082.6
NetLED208_4: LED208.4 R233.2 | length 524.7
  Top Layer w20: 10881.4,7726.4 11140,7985
  Top Layer w30: LED208.4@10881.4,7665 10881.4,7726.4 ; 11140,7985 R233.2@11140,8082.6
NetLED209_1: LED209.1 R237.2 | length 447.2
  Top Layer w30: LED209.1@11082.6,7712.4 11365,7994.8 R237.2@11365,8042.6
NetLED209_3: LED209.3 R235.2 | length 555.6
  Top Layer w30: LED209.3@11219.29,7615 11265,7615 11290,7640 11290,7695 11370,7775 11435,7775 11565,7905 R235.2@11565,7962.6
NetLED209_4: LED209.4 R236.2 | length 393.5
  Top Layer w30: LED209.4@11219,7711 11465,7957.01 R236.2@11465,8002.6
NetLED210_1: LED210.1 R240.2 | length 387.7
  Top Layer w30: LED210.1@11398.86,7661.14 11452.71,7715 11502.6,7715 R240.2@11687.6,7900
NetLED210_3: LED210.3 R238.2 | length 241
  Top Layer w30: LED210.3@11496.34,7500 11567.6,7500 R238.2@11687.6,7620
NetLED210_4: LED210.4 R239.2 | length 240.9
  Top Layer w30: LED210.4@11515,7595 11680,7760 R239.2@11687.6,7760
NetLED211_1: LED211.1 R243.2 | length 545.1
  Top Layer w10: LED211.1@11650,7455 11650,7442.3 11650,7390 11570,7310 11570,7240 11655,7155 11655,7052.6 R243.2@11707.6,7000
NetLED211_3: LED211.3 R241.2 | length 216.3
  Top Layer w10: LED211.3@11652.46,7293.44 11652.46,7197.54 11707.6,7142.4 R241.2@11707.6,7100
NetLED211_4: LED211.4 R242.2 | length 79
  Top Layer w10: R242.2@11727.6,7220 LED211.4@11727.6,7298.98
NetLED301_2: LED301.2 R304.2 | length 140.7
  Top Layer w40: LED301.2@21140,7416.1 R304.2@21140,7556.81
NetLED302_2: LED302.2 R305.2 | length 111.5
  Top Layer w30: LED302.2@21140,5790 R305.2@21140,5901.54
NetMOS103_3: MOS103.3 R118.2 | length 83.1
  Top Layer w10: 11575,4865 MOS103.3@11575,4885
  Top Layer w20: R118.2@11567.6,4805 11567.6,4857.6 11575,4865
NetMOS103_6: MOS103.6 R106.2 | length 63.8
  Top Layer w20: R106.2@11625,4987.6 11625,4965 11640,4950 11640,4930
NetMOS104_3: MOS104.3 R105.2 | length 99.9
  Top Layer w10: R105.2@12125,4995 12185,4935 MOS104.3@12185,4920
NetMOS104_6: MOS104.6 R107.2 | length 239.6
  Top Layer w10: MOS104.6@12118.07,4880 12118.07,4871.93 12160,4830 12160,4785 12179.37,4765.63 12230.63,4765.63 R107.2@12265,4800
NetMOS105_3: MOS105.3 R115.2 | length 136.2
  Top Layer w10: 11305,5400 11320,5385 MOS105.3@11330,5385
  Top Layer w30: R115.2@11200,5400 11205,5400 11305,5400
NetMOS105_6: MOS105.6 R116.2 | length 46.9
  Top Layer w10: MOS105.6@11370,5318.07 R116.2@11416.93,5318.07
NetMOS106_3: MOS106.3 R122.2 | length 120.2
  Top Layer w10: 12675,4850 MOS106.3@12675,4880
  Top Layer w20: 12675,4850 12675,4777.6 R122.2@12687.6,4765
NetMOS106_6: MOS106.6 R124.2 | length 97.4
  Top Layer w20: 12742.4,4927.6 R124.2@12742.4,5025
NetMOS107_6: MOS107.6 R123.2 | length 188.8
  Top Layer w10: 12625,5315 MOS107.6@12625,5358.07 MOS107.6@12625,5360
  Top Layer w20: R123.2@12505,5342.4 12532.6,5342.4 12575,5300 12610,5300 12625,5315
NetMOS110_3: MOS110.3 MOS110.6 R102A.1 | length 361.9
  Top Layer w40: v1(12155,3250) 12165,3260 12165,3285 12225,3345 v1(12245,3345)
  Bottom Layer w10: R102A.1@12120,3100 12120,3180 12172.5,3232.5 12180,3240 12180,3250 MOS110.6@12180,3293.07
NetMOS111_3: MOS111.3 MOS111.6 R102B.1 | length 348.7
  Top Layer w40: v1(12155,3765) 12225,3835 12225,3905 v1(12200,3930)
  Bottom Layer w10: R102B.1@12197.4,3980 12197.4,3967.6 12217.5,3947.5 12220,3945 12220,3930 MOS111.6@12220,3846.93 MOS111.6@12220,3845
NetMOS201_3: MOS201.3 R247.2 | length 247
  Top Layer w30: v1@13740,8630 v1(13745,8625) 13817.6,8552.4 R247.2@13817.6,8520
  Bottom Layer w30: v1(13685,8705) 13685,8685 v1(13745,8625)
NetMOS201_6: MOS201.6 R246.2 | length 131.3
  Top Layer w10: MOS201.6@13781.93,8760 13781.93,8791.93
  Top Layer w30: 13781.93,8791.93 13781.93,8886.93 R246.2@13785,8890
NetMOS202_3: MOS202.3 R253.2 | length 121.6
  Top Layer w10: MOS202.3@13215,8760 13240,8760
  Top Layer w20: 13240,8760 13280,8800 R253.2@13317.6,8800 R253.2@13320,8800
NetMOS202_6: MOS202.6 R248.2 | length 89.6
  Top Layer w10: R248.2@13135,8900 13135,8885 13175,8845 MOS202.6@13175,8826.93
NetMOS203_3: MOS203.3 R255.2 | length 101.6
  Top Layer w10: 12475,8750 12485,8760 MOS203.3@12495,8760
  Top Layer w20: R255.2@12410,8720 R255.2@12412.4,8720 12445,8720 12475,8750
NetMOS203_6: MOS203.6 R254.2 | length 58.1
  Top Layer w10: MOS203.6@12561.93,8800 R254.2@12561.93,8858.07
NetMOS206_6: MOS206.6 TP223.1 U206.4 U207.2 | length 2216.9
  Top Layer w10: 15095,7310 15125,7280 15135,7280 15145,7270 15145,7250 v1@15230,7165
  Top Layer w20: v1@14520,7595 14520,7390 14545,7365 15025,7365 15080,7310 15095,7310 ; U207.2@14760,7725 14820,7725 v1@14865,7725
  Bottom Layer w10: MOS206.6@14121.93,7640 14131.93,7630 14145,7630 ; U206.4@15110,7286.77 15115.08,7281.69 15134.64,7281.69 15146.65,7269.68 15146.65,7253.35 15210,7190 v1@15210,7186.77
  Bottom Layer w20: 14145,7630 14520,7630 14520,7685 14540,7705 14660,7705 14680,7725 v1@14880,7725 ; 14630,7705 14655,7730 TP223.1@14655,7800
  other v1: 15220,7175 14520,7600 14860,7730
NetMOS301_3: MOS301.3 R317.2 | length 271.8
  Top Layer w10: 16580,6725 MOS301.3@16580,6755
  Top Layer w30: 16580,6725 16620,6685 16785,6685 16797.6,6672.4 R317.2@16800,6672.4
NetMOS301_6: MOS301.6 R316.2 | length 479.7
  Top Layer w10: MOS301.6@16645,6795 16645,6825
  Top Layer w30: R316.2@16300,6772.4 16300,6815 16380,6895 16575,6895 16645,6825
NetMOS302_6: MOS302.6 R318.2 | length 140.2
  Top Layer w10: 16910,6570 MOS302.6@16910,6590
  Top Layer w30: R318.2@16897.4,6455 16897.4,6537.4 16910,6550 16910,6570
NetMOS303_3: MOS303.3 R324.2 | length 104.9
  Top Layer w10: MOS303.3@18160,6355 18160,6375 R324.2@18220,6435
NetMOS303_6: MOS303.6 R323.2 | length 109.6
  Top Layer w10: MOS303.6@18200,6288.07 18240,6248.07 R323.2@18240,6195
NetMOS304_3: MOS304.3 R329.2 | length 436.4
  Top Layer w10: MOS304.3@20080,6855 20110,6855 20125,6870
  Top Layer w30: 20125,6870 20300,6870 20415,6755 R329.2@20462.6,6755
NetMOS304_6: MOS304.6 R328.2 | length 259.7
  Top Layer w10: 20005,6785 20005,6795 20015,6805 MOS304.6@20015,6815
  Top Layer w30: 20005,6785 20005,6690 20042.6,6652.4 R328.2@20042.6,6575
NetMOS305_6: MOS305.6 R330.2 | length 299.5
  Top Layer w10: MOS305.6@21045,6435 21045,6460
  Top Layer w30: R330.2@20797.4,6435 20850,6435 20895,6480 21020,6480 21040,6460 21045,6460
NetMOS306A_3: MOS306A.3 R322.2 | length 136.1
  Top Layer w10: MOS306A.3@18760,6355 18790,6325
  Top Layer w20: 18790,6325 18835,6280 18835,6255 R322.2@18835,6250
NetPWR101_1: PWR101.1 R131.2 | length 159.7
  Top Layer w10: PWR101.1@13960,5290 13960,5336.54
  Top Layer w30: 13960,5336.54 R131.2@14040,5416.54
NetPWR101_2: PWR101.2 R129.1 R132.2 | length 393.1
  Top Layer w10: R129.1@13713.46,5230 13934.41,5230 ; PWR101.2@13934.41,5290 13934.41,5230 ; R132.2@14046.54,5230 13934.41,5230
NetPWR102_1: PWR102.1 R133.2 | length 106.5
  Bottom Layer w10: R133.2@14165,5053.46 PWR102.1@14165,5160
NetPWR102_2: PWR102.2 R130.1 R134.2 | length 544.8
  Bottom Layer w10: 14139.41,5115.59 PWR102.2@14139.41,5160
  Bottom Layer w20: 14101.14,5077.32 14105,5081.18 14139.41,5115.59
  Bottom Layer w30: R130.1@13978.46,5200 13978.46,5096.54 13997.68,5077.32 14101.14,5077.32 ; R134.2@14078.46,4880 14105,4906.54 14105,5081.18
NetR263a_1: R263a.1 R263b.2 | length 287.4
  Top Layer w40: R263b.2@15075,7480 15075,7550 15105,7580 R263a.1@15280,7580
NetR265_1: R265.1 R266.1 U206.8 | length 1356.3
  Top Layer w20: v1(15345,7190) 15480,7190 15495,7205 15495,7525 15460,7560 15440,7560 R266.1@15430,7570
  Bottom Layer w10: U206.8@15271.42,7210 15291.42,7190
  Bottom Layer w20: R265.1@14915,7075 14985,7075 15045,7015 15220,7015 15245,7040 15245,7090 15285,7130 15435,7130 v1(15490,7185) ; 15291.42,7190 v1@15360,7190
NetR267_2: R267.2 R271.1 U204.7 | length 664.7
  Top Layer w20: v1(14925,8025) R271.1@15010,8025 ; R271.1@15000,8027.4 R267.2@15092.6,8027.4
  Bottom Layer w20: v1(14925,8025) 14925,7895 14980,7840 15190,7840 15210,7860 U204.7@15210,7901.02
NetR268_2: R268.2 R272.1 U205.7 | length 677.6
  Top Layer w20: v1(15035,8455) 15035,8490 R272.1@15115,8490 ; R272.1@15105,8492.4 R268.2@15187.4,8492.4
  Bottom Layer w20: v1(15035,8455) 15035,8330 15060,8305 15230.5,8305 15235.5,8300 15285,8300 15300,8315 U205.7@15300,8361.02 U205.7@15300,8335.5
NetU202_4: U202.4 U203.2 | length 797.3
  Top Layer w10: v3(10720,8790) 10730,8790 10730,8785 10730,8795 10735,8790 10760,8765 11240,8765 11292.5,8817.5 11300,8825 v3(11300,8810)
  Bottom Layer w10: v3(10720,8790) 10730,8790 U202.4@10730,8720 ; U203.2@11300,8740 v3(11300,8810)
NetU202_7: U202.7 U203.5 | length 746.2
  Top Layer w10: v3@10655,8790 10707,8842 10750.33,8842 10772,8820.33 10772,8813 10780,8805 v3@11225,8805
  Bottom Layer w10: U202.7@10655,8720 v3@10655,8790 ; U203.5@11225,8740 v3@11225,8805
  other v3: 10655,8795 11220,8810
NetU202_9: U202.9 U203.11 | length 813.1
  Top Layer w10: v3(10630,9060) 10655,9085 v3(11120,9085)
  Bottom Layer w10: U202.9@10630,8932.6 v3(10630,9060) ; v3(11120,9085) 11121.26,9083.74 11121.26,9035 11150.63,9005.63 11184.37,9005.63 11200,8990 U203.11@11200,8952.6
NetU202_12: U202.12 U203.14 | length 879.2
  Bottom Layer w10: U202.12@10705,8932.6 10705,9060 10770,9125 11245,9125 11275,9095 U203.14@11275,8952.6
NetValve101_4: Valve101.4 Valve102.1 | length 228
  Top Layer w40: Valve102.1@14720.31,5292.83 Valve101.4@14948.35,5292.83
NetValve102_2: Valve102.2 Valve103.2 | length 160
  Top Layer w50: Valve103.2@14560,5450 Valve102.2@14720,5450
ON/OFF201: R252.1 Reg202.5 S202.2 | length 1291.8
  Top Layer w40: S202.2@12455,6661.1 R252.1@12455,6820 ; v1@13165,6210 13165,6170 13192.72,6142.28 Reg202.5@13290,6142.28
  Bottom Layer w40: v1(12400,6665) 12850,6215 v1(13170,6215)
OPT_RX_101: OptRx101.1 U101.30 | length 391.1
  Bottom Layer w10: OptRx101.1@11665,5485 11665,5395 11735,5325 11930,5325 11932.18,5322.81 U101.30@11935,5320
OPT_RX_201: Opt_Rx_201.1 TP212.1 U201.30 | length 856.6
  Top Layer w10: U201.30@13408.39,7777.24 13437.76,7777.24 13472.91,7742.09 13472.91,7698.12 13492.91,7678.12 13492.91,7677.09 13620,7550 13880,7550 13915,7585 TP212.1@13915,7640 TP212.1@13915,7650
  Top Layer w40: TP212.1@13915,7650 Opt_Rx_201.1@13915,7800
OPT_TX_101: OptTx101.1 U101.31 | length 458.6
  Bottom Layer w10: OptTx101.1@11675,5615 11725,5565 11725,5405 11776.26,5353.74 U101.31@11931.61,5353.74
OPT_TX_201: Opt_Tx_201.1 TP218.1 U201.31 | length 709.8
  Top Layer w10: U201.31@13408.39,7808.74 13451.26,7808.74 13575,7685 13575,7630 13630,7575 13765,7575 13775,7585 TP218.1@13775,7635
  Top Layer w40: TP218.1@13775,7640 Opt_Tx_201.1@13775,7800
PGATE_201: R260.2 U206.6 | length 167.4
  Bottom Layer w10: U206.6@15271.42,7261.18 15323.82,7261.18
  Bottom Layer w20: 15323.82,7261.18 R260.2@15438.82,7261.18
R_CONTROL_101: I140.1 I143.1 MOS101.3 MOS101.6 MOS102.3 MOS102.6 | length 1565.1
  Top Layer w10: v1(12030,3355) 12095,3420 12100,3425 12200,3425 12305,3425 I143.1@12325,3425 ; v1@12045,3795 12045,3765 ; MOS102.6@12055,3741.93 MOS102.6@12055,3755 ; MOS102.3@12095,3675 12115,3655 v1(12120,3655) ; 12045,3765 MOS102.6@12055,3755 ; 12045,3765 MOS102.6@12055,3755
  Top Layer w20: 12235,3695 12265,3725 12320,3725 12330,3735 I140.1@12330,3835
  Top Layer w30: 12095,3420 12205,3420 12200,3425 12165,3460 12165,3610 v1(12120,3655) 12160,3695 12235,3695 ; I143.1@12305,3425 I143.1@12310,3420
  Bottom Layer w10: MOS101.6@12095,3441.93 12095,3460 12110,3475
  Bottom Layer w20: 12110,3475 12140,3505
  Bottom Layer w30: v1(12120,3655) 12140,3635 12140,3505
  Bottom Layer w40: v1(12040,3795) 12040,3790 12115,3715 v1@12115,3660
R_CONTROL_101L: I115.1 R102.1 R103.1 R104.1 R117.1 | length 4519.3
  Top Layer w10: R102.1@15905,4260 R102.1@15915,4250
  Top Layer w30: R104.1@14910,3715 14945,3750 v1(14980,3750) ; v1@15420.51,2776.02 R103.1@15456.54,2740 ; R102.1@15915,4250 15915,4205 v1@15940,4180 ; v1@16387.64,3235 16415.24,3262.6 R117.1@16430,3262.6
  Bottom Layer w20: v1@15929.51,4173.7 ccw(c15673.66,3490) 16295.87,3871.78 16330,3905.92 I115.1@16330,3990
  other v1: 15410,2795 16370,3235 15935,4185
R_CONTROL_101R: I117.1 R135.1 R136.1 R137.1 R138.1 | length 5484
  Top Layer w30: v1@12765,3180 R137.1@12765,3246.54 ; v1@13345,4330 13347.5,4327.5 13355,4320 R136.1@13411.54,4320 ; R138.1@13858.46,2620 13920,2620 v1@13930,2610 ; v1@14480,3770 14485,3765 R135.1@14485,3693.46
  Bottom Layer w10: 14075,4248.88 14079.01,4252.88
  Bottom Layer w20: I117.1@14075,4145 14075,4248.88 ; 14079.01,4252.88 ccw(c13623.66,3465) v1@14478.74,3776.36
  other v1: 13935,2620 12770,3170 14470,3775 13345,4325
R_PWM_101: I129.1 U101.32 | length 188.6
  Bottom Layer w10: I129.1@11850,5540 11850,5466.85 U101.32@11931.61,5385.24
R_PWM_101A: I147.1 MOS101.2 MOS101.5 MOS102.2 MOS102.5 R110.2 | length 508.8
  Top Layer w10: MOS102.5@12075,3741.93 MOS102.2@12075,3675 12075,3580 v1(12080,3575) 12080,3560 12080,3525 I147.1@12090,3515
  Top Layer w30: R110.2@12008.46,3555 12075,3555 v1@12080,3560
  Bottom Layer w10: MOS101.2@12075,3375 MOS101.5@12075,3441.93 12075,3570 v1(12080,3575)
RESET101: ISP101.1 R128.1 S101.1 U101.29 | length 1300.2
  Top Layer w10: v1(12005,5290) 12066.54,5290 R128.1@12085,5271.54 12211.54,5271.54 12280,5340 12280,5425 12325.71,5470.71 12679.29,5470.71 12695,5455 v1@12725,5455 ; v1@12950,5405 S101.1@13065,5405
  Bottom Layer w10: U101.29@11931.61,5290.75 12004.25,5290.75 v1(12005,5290) ; v1(12725,5450) 12825,5450 12910,5450 v1(12950,5410) ; v1@12947.5,5407.5 v1@12950,5405
RESET201: ISP201.1 R277.1 S205.1 U201.29 | length 1503.4
  Top Layer w10: ISP201.1@12535,7890 12620,7890 12665,7845 v1(12810,7845) ; v1(13155,7820) 13256.5,7820 13330.75,7745.75 U201.29@13408.39,7745.75
  Top Layer w30: R277.1@12275,8306.54 12275,8265 12305,8235 S205.1@12380,8235 ; S205.1@12375,8240 12485,8130 12535,8080 ISP201.1@12535,7895
  Bottom Layer w40: v1(12810,7845) 12835,7820 v1(13155,7820)
RESET301: ISP301.1 R334.1 S301.1 U301.29 | length 3476.2
  Top Layer w10: v3(17390,7180) 17425,7215 17840,7215 17975,7350 18225,7350 18285,7410 18480,7410 18580,7310 v1@18780,7310 ; R334.1@18785,7260 v1(18785,7305) 18890,7305 18940,7255
  Bottom Layer w10: U301.29@18703.39,7314.25 18775.75,7314.25 v1(18785,7305)
  Bottom Layer w30: ISP301.1@16220,8045 16220,7840 16880,7180 v3@17385,7180
SCK101: ISP101.5 U101.17 | length 685.9
  Bottom Layer w10: U101.17@12205.24,5111.61 12260.05,5111.61 12293.2,5144.76 12323.5,5144.76 12335,5156.26 12667.83,5156.26 12740,5228.43 12740,5240 12755,5255 ISP101.5@12825,5255
SCK201: ISP201.5 U201.17 | length 651.8
  Top Layer w10: ISP201.5@12535,7690 12625,7690 12750,7565 13134.76,7565 U201.17@13135,7565
SCK301: ISP301.5 U301.17 | length 2769.7
  Top Layer w20: v3(17245,7375) 17270,7350 17640,7350 17785,7495 v3(18395,7495)
  Bottom Layer w20: ISP301.5@16220,8245 16415,8245 16850,7810 16850,7590 17065,7375 v3(17245,7375) ; v3(18395,7495) 18429.76,7495 U301.17@18430,7495
SMPSBENABLE_101: I124.1 U101.14 | length 221
  Top Layer w10: v1(12185,5230) 12245,5170 I124.1@12245,5105
  Bottom Layer w10: v1@12187.24,5227.76 U101.14@12258.39,5227.76
SMPSBENABLE_101B: I120.1 PWR102.3 TP119.1 | length 722.2
  Top Layer w40: v1(14320,5185) I120.1@14320,4930 TP119.1@14480,4930
  Bottom Layer w10: PWR102.3@14113.82,5160 14113.82,5230
  Bottom Layer w40: 14113.82,5230 14128.82,5245 14260,5245 v1(14320,5185)
SW_201: R207.1 S201.5 U202.2 | length 561.7
  Bottom Layer w10: U202.2@10780,8720 10780,8655 10817.6,8617.4 S201.5@10817.6,8500 10817.6,8302.4 10865,8255 R207.1@10865,8193.46
SW_202: R203.1 S201.2 U202.5 | length 579.8
  Bottom Layer w10: R203.1@10665,8193.46 10665,8250 10620.75,8294.25 S201.2@10620.75,8500 10620.75,8555.75 10705,8640 U202.5@10705,8720
SW_203: R202.2 S201.7 U202.11 | length 960.9
  Bottom Layer w10: U202.11@10680,8932.6 10680,8900.34 10707.84,8872.5 10722.5,8872.5 10733,8862 10736.77,8862 10754.63,8844.13 10890.87,8844.13 10985,8750 10985,8529.45 S201.7@11014.45,8500 11014.45,8305.55 11045,8275 R202.2@11045,8213.46
SW_204: R206.2 S201.9 U202.14 | length 1061.6
  Bottom Layer w10: U202.14@10755,8932.6 10758.76,8928.84 10758.76,8896.58 10771.2,8884.13 10788.8,8884.13 10790.92,8886.26 10793.04,8884.13 10935.87,8884.13 11030,8790 11030,8625 11155,8500 S201.9@11211.3,8500 11211.3,8293.7 11265,8240 R206.2@11265,8213.46